# Altium PCB Copy of corePCB3.PcbDoc (part 3 of 3)
Units mil, origin at the board's own origin, x right, y up, seen from the top; angles counter-clockwise.
Board outline 6000 x 4000 mil, 6 copper layers (Top Layer, Layer 3, Layer 1, Layer 2, Layer 4, Bottom Layer), stack 32.111 mil thick; 90 components, 166 nets, 637 pads, 472 vias.
Unrouted connection lines stored in the file: 122.
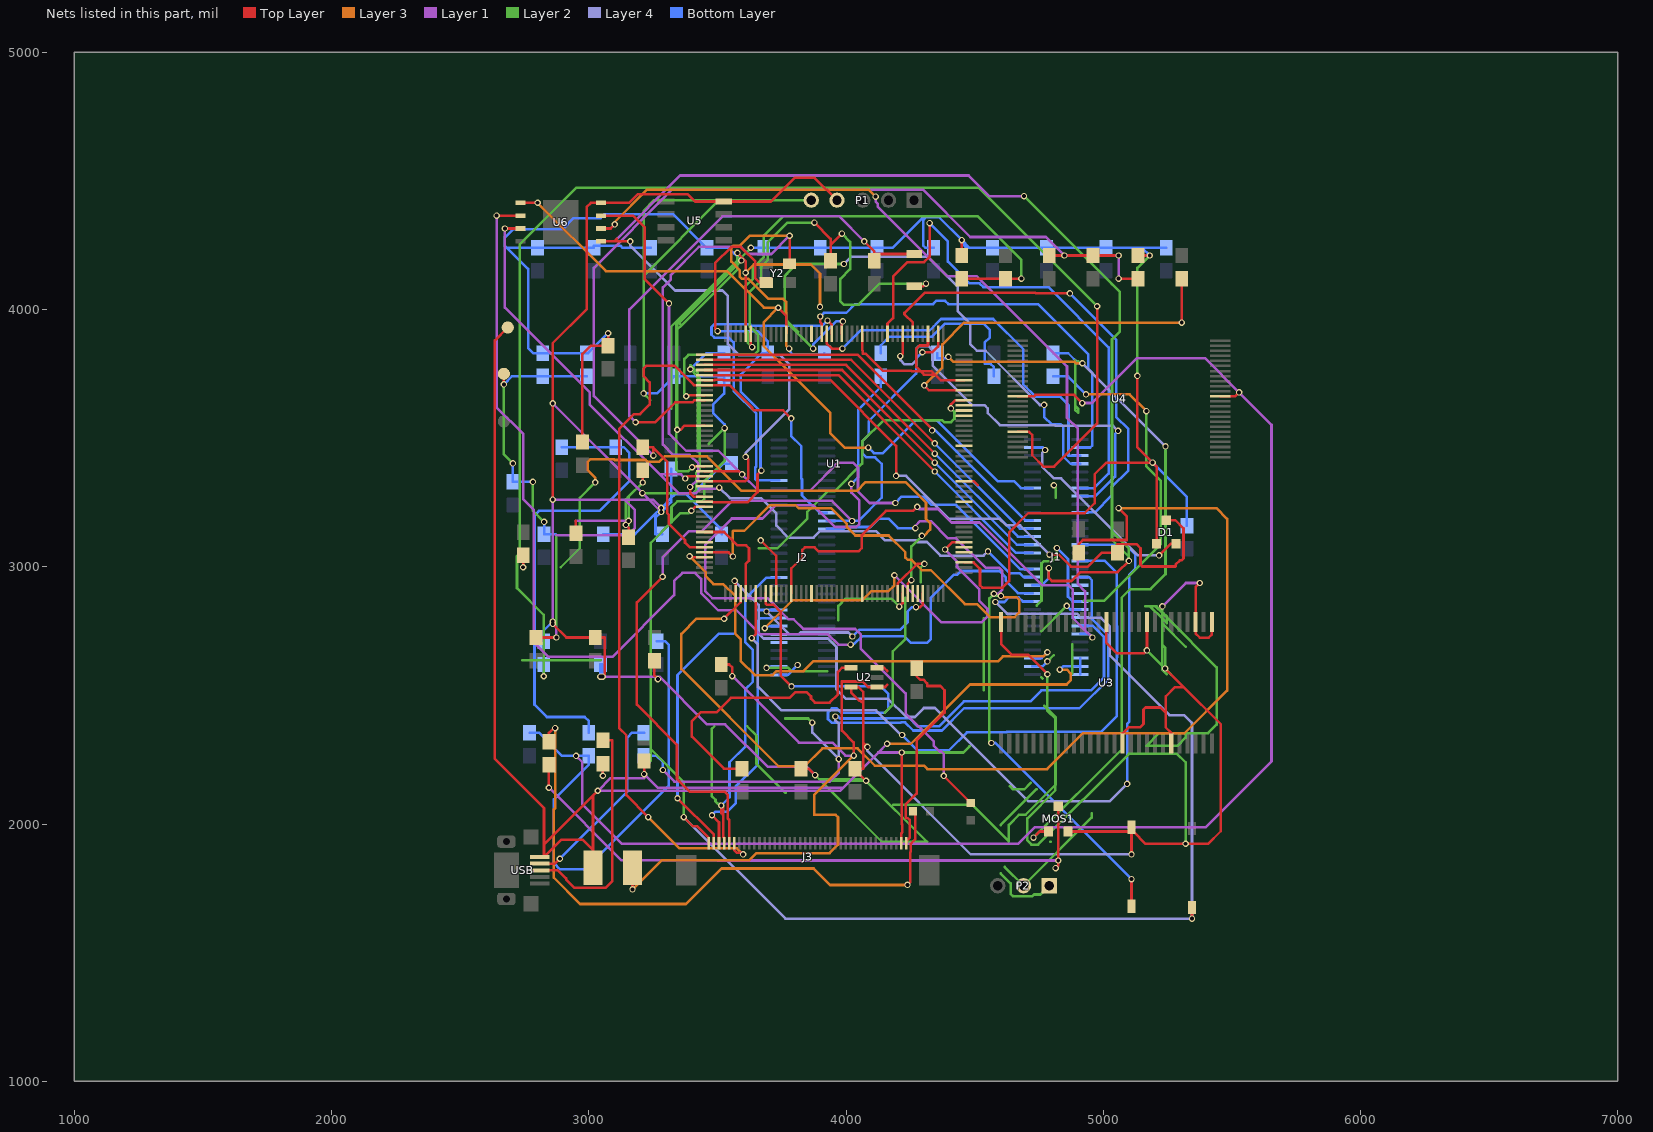
[diagram p7: the nets of this part, all layers, seen from the top]

## Via types
v1: diameter 25, hole 15, Top Layer to Bottom Layer, 472 vias

## Nets (pads, with @x,y where several pads share a name; then routed paths per layer and width w, separated by ;. In a path a pad name is that pad's centre, name@x,y a point inside that pad or via, vN(x,y) a via of type N, cw(c..) or ccw(c..) an arc to the next point about the centre after c; other vN are vias at no path point) (continued)
NetC1_1: C1.1 D1.3 U1.6 | length 2574.1
  Top Layer w10: U1.6@3450,3725.59 3488.98,3725.59 3490.14,3726.75 3520.98,3726.75 3522.14,3725.59 3939.68,3725.59 4195,3470.27 v1(4195,3353) ; v1(4791,3047.5) 4827,3047.5 4874,3000.5 4940.5,3000.5 4995,3055 C1.1@5055.06,3055 5055.06,3088 5129,3088 5145,3072 5145,3008 5152,3001 5280,3001 5281.42,3002.42 5281.42,3008 5298,3024.59 5303.59,3024.59 5312,3033 5312,3149.26 5280,3181.26 D1.3@5245,3181.26
  Layer 4 w10: v1(4195,3353) 4233.46,3353 4400,3186.46 4597.54,3186.46 4622.67,3161.33 4677.17,3161.33 v1(4791,3047.5)
NetC2_2: C2.2 C4.2 R2.1 U1.38 | length 655
  Top Layer w10: C2.2@2950.06,3130 2950.06,3177.94 ; v1(3144.25,3162.5) 3155.06,3151.68 C4.2@3155.06,3115 ; v1(3210,3327.55) R2.1@3210,3375
  Layer 1 w10: 2950.06,3177.94 2950.63,3178.5 v1(3155.06,3178.5)
  Layer 2 w10: v1(3144.25,3162.5) 3144.25,3261.79 3155.06,3272.61 ; v1@3155.06,3162.5 v1(3155.06,3178.5) 3155.06,3272.61 ; v1(3210,3327.55) 3155.06,3272.61
NetC3_1: C3.1 U1.81 | length 2359.9
  Top Layer w10: v1(2745,2998.06) 2745.06,2998.13 C3.1@2745.06,3045 ; U1.81@4239.98,2896.24 4239.98,2933.98 v1(4254,2948)
  Layer 2 w10: 2891.06,2998.06 2965,3072 2965,3268 v1(3025,3328) ; v1(4254,2948) 4254,3079 v1(4295,3120)
  Layer 3 w10: v1(3025,3328) 3025,3346.5 2995.5,3376 2995.5,3408 3005.28,3417.78 3098.65,3417.78 3101.43,3415 3220.93,3415 3227.43,3408.5 3274.43,3408.5 3295.43,3429.5 3460.02,3429.5 3594.52,3295 4042,3295 4076,3329 4231.19,3329 4311,3249.19 4311,3186.5 4327,3170.5 4327,3144 4303,3120 v1(4295,3120)
NetC5_1: C5.1 U1.125 | length 1488
  Top Layer w10: v1(4304,3705) 4322.78,3686.22 U1.125@4459.09,3686.22 ; v1(5305.06,3949.06) C5.1@5305.06,4120
  Layer 3 w10: v1(4304,3705) 4374.5,3775.5 4374.5,3864.26 4459.31,3949.06 v1(5305.06,3949.06)
NetC8_2: C8.2 U1.9 Y1.1 | length 2148.9
  Top Layer w10: v1(3379,3663) 3382.54,3666.54 U1.9@3450,3666.54 ; v1(3877.13,4338) 3940.06,4275.06 3940.06,4251.45 ; C8.2@3940.06,4190 3940.06,4251.45 ; v1(3983.81,4295.19) 3940.06,4251.45 ; Y1.1@4265,4090 4300,4090 v1(4311,4101)
  Layer 2 w10: v1(3379,3663) 3371.5,3670.5 3371.5,3808 3387.5,3824 3643,3824 3659,3840 3659,3900.93 3625.93,3934 3625.93,4070 3671,4115.07 3671,4168 3696.5,4193.5 3696.5,4262 3772.5,4338 v1(3877.13,4338) ; v1(3983.81,4295.19) 4016,4263 4016,4157 3978.26,4119.26 3978.26,4032 3991.03,4019.23 4049,4019.23 4130.77,4101 v1(4311,4101)
NetC9_2: C9.2 U1.10 Y1.2 | length 2100.3
  Top Layer w10: v1(3182,3562) 3259,3562 3336.22,3639.22 3402.5,3639.22 3410.13,3646.85 U1.10@3450,3646.85 ; v1(4071,4265) 4110.06,4225.94 C9.2@4110.06,4215.98 ; C9.2@4110.06,4190 C9.2@4110.06,4215.98 ; Y1.2@4265,4215.98 C9.2@4110.06,4215.98
  Layer 1 w10: v1(3182,3562) 3158,3586 3158,4000 3520,4362 3974,4362 v1(4071,4265)
NetC10_2: C10.2 U1.30 Y2.1 | length 1706
  Top Layer w10: U1.30@3450,3253.15 3479,3253.15 3482.15,3250 3482.65,3250.5 3616.5,3250.5 3656,3290 3656,3359 v1(3671,3374) ; v1(3501,3916) 3491.5,3925.5 3491.5,4180.36 3554.56,4243.42 3590.58,4243.42 3648,4186 3648,4121 3664,4105 Y2.1@3690,4105
  Bottom Layer w10: v1(3501,3916) 3656.61,3916 3696.07,3876.55 C10.2@3696.07,3830.59 3674,3830.59 3591,3747.59 3591,3680 3667.5,3603.5 3667.5,3386.5 3671,3383 v1(3671,3374)
NetC11_2: C11.2 U1.29 Y2.3 | length 2626.5
  Top Layer w10: v1(3394,3310) 3394,3286.83 3408,3272.83 U1.29@3450,3272.83 ; Y2.3@3780.55,4177.83 3780.55,4286.55 v1(3781,4287)
  Layer 1 w10: v1(3394,3310) 3426,3342 3426,3401 3392,3435 3328,3435 3288,3475 3288,4086 3319,4117 3319,4135 3428,4244 3592,4244 3620,4216 3710,4216 v1(3781,4287)
  Layer 3 w10: v1(3779,3848) 3767.54,3859.46 3767.54,4029.46 3755.5,4041.5 3698.5,4041.5 3620.5,4119.5 3595,4119.5 3586.5,4128 3586.5,4153.5 3554,4186 3554,4240 3562.68,4248.68 3588.68,4248.68 3627,4287 v1(3781,4287)
  Bottom Layer w10: v1(3779,3848) 3779,3840 3795,3824 3916.07,3824 C11.2@3916.07,3830.59
NetC28_2: C28.2 J3.1 | length 840.1
  Top Layer w10: J3.1@4234.65,1925 4234.65,1934 4248,1947.35 4248,2015 4240,2023 4233,2023 4233,2077 4274.69,2118.69 4274.69,2324.29 4383,2432.59 4383,2520 4366.5,2536.5 4315.72,2536.5 4315.72,2546.28 4301,2561 4288,2561 4275,2574 C28.2@4275,2605
NetC29_2: C29.2 F1.2 U2.1 U2.3 | length 2676.4
  Top Layer w10: v1(3170,1746) F1.2@3170,1830 ; C29.2@3515,2620 3546,2620 3558,2608 v1(3558,2575) ; v1(4030,2266) 4030,2317 3984,2363 3984,2554 4065,2554 4086.4,2532.6 U2.1@4120,2532.6 4152,2532.6 4161,2541.6 ; U2.3@4120,2607.4 4147.97,2607.4 4161,2594.37
  Layer 1 w10: v1(3558,2575) 3817,2316 3948,2316 3998,2266 v1(4030,2266)
  Layer 3 w10: v1(3170,1746) 3282.5,1858.5 3623.5,1858.5 3652,1887 3936,1887 3969,1920 3969,2026.5 3960,2035.5 3876.37,2035.5 3876,2035.87 3876,2112 v1(4030,2266)
NetC30_2: C30.2 U2.4 | length 1101.3
  Top Layer w10: C30.2@3595.06,2215 3525.84,2215 3401,2339.84 3401,2400 3435,2434 3496,2434 3552.5,2490.5 3780.5,2490.5 3803,2513 3847,2513 3864,2496 3864,2487 3879,2472 3936,2472 3968,2504 3968,2591.4 3984,2607.4 U2.4@4020,2607.4
NetC35_2: C35.2 C36.2 R16.1 U4.12 U4.37 | length 7575.3
  Top Layer w10: U4.12@4667.6,3662.48 4730.5,3662.48 4736.52,3668.5 4886.33,3668.5 v1(4918.33,3636.5) ; U4.37@5455,3662.48 5512.48,3662.48 v1(5528,3678)
  Layer 1 w10: v1(2951,2265) 2974,2242 2974,2078 3129.11,1922.89 4668.89,1922.89 4733,1987 5398,1987 5654,2243 5654,3552 v1(5528,3678) 5395,3811 5131.36,3811 4956.86,3636.5 v1(4918.33,3636.5)
  Bottom Layer w10: C36.2@2770.06,2355 2806,2355 2896,2265 v1(2951,2265) R16.1@3000.06,2265 3000.06,2232.06 2864,2096 2864,1848 2888,1824 2986.23,1824 3311.5,2149.27 3311.5,2696 3297.5,2710 C35.2@3265.06,2710
NetDS0_1: DS0.1 R10.2 | length 2460.7
  Top Layer w10: R10.2@2845,2320 2845,2354 2864,2373 v1(2869,2373) ; v1(4239,1763) 4249,1773 4249,1890 4251,1892 4251,1923 4270,1942 4270,2050 DS0.1@4260,2050
  Layer 3 w10: v1(2869,2373) 2869,2062 2864,2057 2864,1791 2966,1689 3378,1689 3516,1827 3874,1827 3938,1763 v1(4239,1763)
NetMOS1_1: MOS1.1 R13.2 R14.2 | length 3456.9
  Top Layer w10: v1(4729,1947) 4752.79,1970.79 MOS1.1@4787.6,1970.79
  Layer 2 w10: v1(4729,1947) 5072,2290 5072,2880 5105,2913 5184,2913 5242,2971 v1(5242,3468) ; 4891,3803 4891,3610 4903,3598 4903,3614.17 4891.5,3625.67 4891.5,3786.5 4903,3798
  Layer 3 w10: v1(4398,3816) 4417.43,3796.57 4888.32,3796.57 4893.89,3791 v1(4919,3791)
  Layer 4 w10: v1(4919,3791) v1(5242,3468)
  Bottom Layer w10: R14.2@4355.06,3830 4355.06,3810 4399,3810 4399,3816 v1(4398,3816) ; R13.2@4805.06,3830 4864,3830 4903,3791 v1(4919,3791)
NetPWR_1: PWR.1 R15.1 | length 3026.5
  Top Layer w10: v1(4380,2186.93) PWR.1@4485,2081.93
  Layer 1 w10: v1(4021,3322) 4021,3288 4052,3257 4052,3166.96 4039.54,3154.5 3956.5,3154.5 3871.5,3239.5 3727.5,3239.5 3675.5,3187.5 3556,3187.5 3452.5,3084 3452.5,2905.5 3480,2878 3694,2878 3776,2796 3796,2796 3834,2758 4036,2758 4058,2736 4058,2681 4231.5,2507.5 4231.5,2430.24 4341.23,2320.51 4341.23,2304 4363.49,2281.74 4370.26,2281.74 4380,2272 v1(4380,2186.93)
  Bottom Layer w10: v1(4021,3322) 4047,3348 4047,3610 4135.06,3698.06 R15.1@4135.06,3740
NetR1_1: R1.1 U1.48 | length 4388.8
  Top Layer w10: v1(3526.37,2798) 3590.37,2862 U1.48@3590.37,2896.24 ; R1.1@4905.06,3055 4905.06,3088 4921.06,3104 5091.06,3104 5091.06,3196.94 v1(5060,3228)
  Layer 3 w10: v1(3526.37,2798) 3418.49,2798 3360,2739.51 3360,2602 3737.5,2224.5 3838.5,2224.5 3908,2294 4044.78,2294 4111.78,2227 4303,2227 4316.5,2213.5 4781.5,2213.5 4920,2352 5315,2352 5482,2519 5482,3186 5440,3228 v1(5060,3228)
NetR4_1: R4.1 R5.1 U1.171 | length 1934.1
  Top Layer w10: U1.171@3629.74,3905.33 3629.74,3862 3635,3856.74 v1(3635,3854) ; R5.1@4450.06,4120 R4.1@4620.06,4120 v1(4682,4120)
  Layer 2 w10: v1(3635,3854) 3617.5,3871.5 3617.5,3913.93 3609.93,3921.5 3609.93,4091.45 3637.98,4119.5 3637.98,4161.98 3680.5,4204.5 3680.5,4287.33 3756.17,4363 4511,4363 4682,4192 v1(4682,4120)
NetR11_2: R11.2 USB.3 | length 907.6
  Top Layer w10: USB.3@2809,1820 2880,1820 2912,1788 2912,1784 2944,1752 3065,1752 3092,1779 3092,2325 R11.2@3055.06,2325
NetR12_2: R12.2 USB.2 | length 740
  Top Layer w10: USB.2@2809,1845.59 2868.59,1845.59 v1(2888,1865)
  Bottom Layer w10: v1(2888,1865) 3150,2127 3150,2337 3168,2355 R12.2@3215,2355
NetR18_1: R18.1 U4.19 | length 5540
  Top Layer w10: U4.19@4667.6,3524.68 4712,3524.68 4724,3512.68 4724,3433.5 4768,3389.5 4808.5,3389.5 4976,3557 v1(4976,4013)
  Layer 2 w10: 2742,2637 2825,2637 ; v1(2825,2574.47) 2825,2637 ; 3047,2637 2825,2637 ; v1(4976,4013) 4515,4474 2952,4474 2732,4254 2732,3052 2721,3041 2721,2917 2825,2813 2825,2637
  Bottom Layer w10: v1(2825,2574.47) 2825.06,2574.54 R18.1@2825.06,2620
NRF_CE: J2.25 U1.155 | length 1317.7
  Top Layer w10: v1(3928,3957) 3944.7,3940.3 U1.155@3944.7,3905.33
  Bottom Layer w10: J2.25@3740,3335.94 3651.12,3335.94 3647.5,3339.57 3647.5,3386.5 3651.5,3390.5 3651.5,3595.5 3563,3684 3563,3872 3544,3891 3488,3891 3477,3902 3477,3932 3488,3943 3625.93,3943 3631.43,3937.5 3908.5,3937.5 v1(3928,3957)
NRF_CS: J1.34 U1.153 | length 2317.2
  Top Layer w10: U1.153@3984.07,3905.33 3984.07,3950.07 v1(3988,3954)
  Layer 2 w10: 3771,3956 3814,3913 ; v1(3872,3848) 3767.54,3952.46 3767.54,3984.45 3762,3989.99 3762,4131 3771,4140 3808,4177 v1(3992,4177)
  Layer 4 w10: v1(3992,4177) 4020,4205 4318,4205 4435,4088 4435,3993 4483.5,3944.5 4483.5,3864.89 4508.63,3839.75 4543.25,3839.75 4754,3629 v1(4770,3629)
  Bottom Layer w10: v1(3872,3848) 3872,3864 3962,3954 v1(3988,3954) ; v1(4770,3629) 4770,3583 4800,3553 4835.59,3553 4844.5,3544.09 4844.5,3429.5 4873.49,3400.51 J1.34@4910,3400.51
PA0: J2.42 U1.40 WKUP.1 | length 4136.7
  Top Layer w10: U1.40@3450,3056.3 3544,3056.3 v1(3560.3,3040) ; WKUP.1@5110,1680 v1(5110,1786)
  Layer 1 w10: v1(4270,3150.5) 4270,3159.5 4288,3177.5 4329.57,3177.5 4396.49,3110.58 4428.47,3110.58 4543.51,2995.54 4596.01,2995.54 4608,2983.54 4608,2912 4591,2895 v1(4575,2895)
  Layer 2 w10: v1(4565,2315) 4557.5,2322.5 4557.5,2876 ; v1(4575,2895) 4557.5,2877.5 4557.5,2876 ; v1(4602,2886.5) 4568,2886.5 4557.5,2876
  Layer 3 w10: v1(3560.3,3040) 3560.3,3138.8 3561.5,3140 3604.84,3140 3704.34,3239.5 3803.79,3239.5 3815.5,3227.79 3941.44,3227.79 4003.71,3165.52 4003.71,3154.5 4036.69,3121.52 4165.76,3121.52 4230.8,3056.48 4230.8,3035.7 4240,3026.5 4255,3026.5 4294.54,2986.96 4329.43,2986.96 4461.9,2854.5 4509.98,2854.5 4560,2804.48 4656,2804.48 4673,2821.48 4673,2872.5 4664,2881.5 4607,2881.5 v1(4602,2886.5)
  Bottom Layer w10: J2.42@3925.04,3146.97 3990.47,3146.97 3998,3154.5 4095.02,3154.5 4128,3187.48 4164.95,3187.48 4201.92,3150.5 v1(4270,3150.5) ; v1(4565,2315) 4581,2315 v1(5110,1786)
PA1: J1.3 U1.41 | length 1891.3
  Top Layer w10: v1(3392,3041) 3396.39,3036.61 U1.41@3450,3036.61
  Layer 3 w10: v1(3392,3041) 3455.04,2977.96 3455.04,2962.42 3484.84,2932.62 3522.66,2932.62 3569.53,2885.75 3569.53,2739.1 3590.08,2718.55 3590.08,2633.97 3645.56,2578.5 3714.5,2578.5 3730.5,2594.5 3835.5,2594.5 3874.5,2633.5 4592,2633.5 4610,2651.5 4767,2651.5 v1(4783,2667.5)
  Bottom Layer w10: J1.3@4724.96,2644.61 4760.11,2644.61 v1(4783,2667.5)
PA3: J1.44 U1.47 | length 3285.1
  Top Layer w10: v1(3567,2945) 3570.69,2941.31 U1.47@3570.69,2896.24
  Layer 4 w10: v1(3567,2945) 3660,2852 3660,2741 3680,2721 3930,2721 3963,2688 3963,2523.5 4000,2486.5 4164,2486.5 4234.5,2416 4268,2416 4303,2451 4346,2451 4709,2088 5025,2088 v1(5093,2156)
  Bottom Layer w10: J1.44@4910,3085.55 5088,3085.55 5124,3049.55 5124,2992 5101,2969 5101,2397 5093,2389 v1(5093,2156)
PA5: J1.46 U1.51 | length 2651
  Top Layer w10: v1(3633.43,2722.57) 3649.43,2738.57 U1.51@3649.43,2896.24
  Layer 4 w10: v1(3633.43,2722.57) 3657.5,2698.5 3657.5,2534.13 3749.63,2442 4117.5,2442 4213.5,2346 v1(4218,2346)
  Bottom Layer w10: v1(4218,2346) 4277.5,2286.5 4399.5,2286.5 4469.5,2356.5 4623.13,2356.5 4624.63,2358 4991.5,2358 5051.97,2418.47 5051.97,2647.29 5053.47,2648.79 5053.47,2767.97 5051.97,2769.47 5051.97,2977.03 5006.44,3022.56 J1.46@4910,3022.56
PA7: J1.48 U1.53 | length 2799.5
  Top Layer w10: U1.53@3688.8,2896.24 3688.8,2856 3692.44,2852.36 3717.67,2852.36 3746,2824.04 3746,2577 v1(3788,2535)
  Bottom Layer w10: v1(3788,2535) 4136,2535 4165,2506 4165,2448 4149.25,2432.25 3981.75,2432.25 3964.5,2449.5 3945.5,2449.5 3930,2434 3930,2408 3944,2394 4212.86,2394 4213.98,2395.12 4229.88,2395.12 4261.5,2363.5 4372.5,2363.5 4459,2450 4907.41,2450 5019.97,2562.56 5019.97,2733.25 4956,2797.22 4956,2947.57 4944,2959.57 J1.48@4910,2959.57
PA9: J1.51 P2.1 U1.120 | length 1116.9
  Layer 2 w10: 4601,1808 4640,1769 4640,1728.47 4649,1719.47 4724.47,1719.47 4731,1726 4756,1726 P2.1@4790,1760 ; 4601,1995.37 4741,2135.37 ; 4741,2849 4760,2868 4760,3013 4768,3021 4801,3021 4820,3040 v1(4820,3073) ; 4879,2584 4879,2699
  Bottom Layer w10: v1(4820,3073) 4863,3030 4863,2884 4881.92,2865.08 J1.51@4910,2865.08
PA10: J1.52 P2.2 U1.121 | length 699.1
  Layer 2 w10: 4617,1833 P2.2@4690,1760 4955,2025 4955,2041 ; 4759,2570.5 4764,2565.5 ; 4759,2749 v1(4858,2848)
  Bottom Layer w10: v1(4858,2848) 4872.42,2833.58 J1.52@4910,2833.58
PA11: J1.53 R11.1 U1.122 | length 47.5
  Top Layer w10: v1(3055.06,2187.5) R11.1@3055.06,2235
PA12: J1.54 R12.1 U1.123 | length 3917.2
  Top Layer w10: v1(4408,3615.8) 4408,3630.85 4424,3646.85 U1.123@4459.09,3646.85
  Layer 1 w10: v1(3288,2210) 3333,2165 3936,2165 3972,2201 v1(3972,2252)
  Layer 2 w10: 3661.11,3072 3733.47,3072 3849.5,3188.03 3849.5,3213.88 3928.68,3293.06 3954.53,3293.06 4063,3401.53 4063,3487 4145.5,3569.5 4374.5,3569.5 4381.6,3562.4 4408.13,3562.4 4421.73,3576 4421.73,3602.06 v1(4408,3615.8) ; 3764.07,2410 3853,2410 v1(3869,2394)
  Layer 4 w10: v1(3869,2394) 3869,2355 v1(3972,2252) 3972,2389 3959,2402 v1(3959,2418)
  Bottom Layer w10: R12.1@3215,2265 3264,2265 3288,2241 v1(3288,2210) ; v1(3959,2418) 3969.5,2418 3977.5,2410 4159.28,2410 4160.4,2411.12 4245.88,2411.12 4277.5,2379.5 4361.78,2379.5 4458.78,2476.5 4716.5,2476.5 4759.4,2519.4 4952.87,2519.4 5002.94,2569.47 5002.94,2727.65 4960,2770.59 J1.54@4910,2770.59
PB2: J1.55 U1.58 U6.6 | length 4992.5
  Top Layer w10: U6.6@3047.99,4315 3085,4315 v1(3101,4331) ; U1.58@3787.22,2896.24 3787.22,2993.78 3829.88,3036.44 3829.88,3065.38 3840,3075.5 3877.5,3075.5 3893.07,3059.93 4048.43,3059.93 4060.5,3072 4060.5,3121.99 4155.51,3217 4261,3217 v1(4277,3233)
  Layer 1 w10: v1(4115,4439) 4115,4420 4123,4412 4123,4400 4394,4129 4509,4129 4859,3779 4859,3579 4901,3537 4901,2933 4930,2904 4930,2753 ; v1(4277,3233) 4285.5,3224.5 4358.5,3224.5 4411,3172 4519,3172 4762.25,2928.75 4864.79,2928.75 4881.54,2912 4881.54,2801.46 4930,2753 ; v1(4958,2725) 4930,2753
  Layer 3 w10: v1(3101,4331) 3101,4340 3227,4466 4088,4466 v1(4115,4439)
  Bottom Layer w10: J1.55@4910,2739.09 4943.91,2739.09 v1(4958,2725)
PB6: J1.24 U1.164 U6.1 | length 2884.4
  Top Layer w10: U6.1@2735,4415 v1(2800.91,4415) ; v1(3736.54,4007) 3767.54,3976 U1.164@3767.54,3905.33
  Layer 3 w10: v1(2800.91,4415) 3066.35,4149.55 3538,4149.55 3680.55,4007 v1(3736.54,4007) 3680,3950.46 3680,3858 3938.5,3599.5 3938.5,3519.5 3994.5,3463.5 v1(4086.5,3463.5)
  Bottom Layer w10: v1(4086.5,3463.5) 4108.5,3441.5 4143.5,3441.5 4272,3570 4352.7,3570 4589.7,3333 4653.02,3333 4680,3306.02 J1.24@4724.96,3306.02
PB10: J2.2 U1.79 | length 1024.7
  Top Layer w10: U1.79@4200.61,2896.24 4200.61,2934.61 4277,3011 v1(4305,3011)
  Layer 2 w10: v1(3691,2607) 3776,2607 3788.5,2594.5 3926.48,2594.5 ; 4150,2432 4182,2464 4182,2671.5 4230.5,2720 4230.5,2879.5 ; 4290.2,2939.2 4290.2,2996.2 v1(4305,3011)
  Bottom Layer w10: v1(3691,2607) 3695.54,2611.54 J2.2@3740,2611.54
PB11: J2.1 U1.80 | length 461.8
  Top Layer w10: v1(4207,2845) 4220.3,2858.3 U1.80@4220.3,2896.24
  Layer 2 w10: 3970.03,2792.03 3970.03,2848 3998.01,2875.98 4176.02,2875.98 v1(4207,2845)
  Bottom Layer w10: J2.1@3740,2580.04 3774.04,2580.04 v1(3812,2618)
PB13: J2.5 U1.93
PB14: J2.6 U1.94
PB15: J2.7 U1.95 | length 1532.3
  Top Layer w10: v1(4385,3067) 4413.67,3095.67 U1.95@4459.09,3095.67
  Layer 1 w10: v1(4188,2967) 4370,2785 4528,2785 4550,2807 4550,2836.37 4518.69,2867.68 4518.69,2912 4431.61,2999.08 4431.61,3020.39 v1(4385,3067)
  Layer 3 w10: v1(3684,2761) 3793,2870 4064,2870 4098,2904 4164,2904 4188,2928 v1(4188,2967)
  Bottom Layer w10: v1(3684,2761) 3692.02,2769.02 J2.7@3740,2769.02
PC4: J1.49 U1.54
PC5: J1.50 U1.55 | length 230.9
  Top Layer w10: v1(3668.55,3102.44) 3728.17,3042.82 U1.55@3728.17,2896.24
PC10: J1.40 U1.139 | length 1827.9
  Top Layer w10: U1.139@4259.67,3905.33 4259.67,3948.83 4227.5,3981 4227.5,3986.72 4306.28,4065.5 4735.56,4065.5 4738.06,4063 v1(4870.13,4063)
  Bottom Layer w10: v1(4870.13,4063) 5050.5,3882.63 5050.5,3582.5 5097.5,3535.5 5097.5,3373.92 5032.79,3309.21 5032.79,3276.98 4967.35,3211.54 J1.40@4910,3211.54
PC12: J1.38 U1.141 | length 1546.3
  Top Layer w10: v1(4211,3819) 4220.3,3828.3 U1.141@4220.3,3905.33
  Layer 4 w10: v1(4211,3819) 4211,3803 4227,3787 4256,3787 4273.5,3804.5 4273.5,3848 4283,3857.5 4320,3857.5 4336.5,3841 4336.5,3781.98 4491.14,3627.34 4539.66,3627.34 4551,3616 4551,3597.32 4597.82,3550.5 4812,3550.5 4814.5,3548 5038,3548 v1(5058,3528)
  Bottom Layer w10: J1.38@4910,3274.53 4969.74,3274.53 5046,3350.79 5046,3516 v1(5058,3528)
PD2: J1.37 U1.144 | length 2104.1
  Top Layer w10: U1.144@4161.24,3905.33 4161.24,3945.06 4183.37,3967.19 4183.37,4128.37 4239,4184 4304,4184 4325,4205 v1(4325,4336)
  Bottom Layer w10: v1(4325,4336) 4396,4265 4396,4186 4480,4102 4519,4102 4534,4087 4787,4087 5021.25,3852.75 5021.25,3362.59 4964.69,3306.02 J1.37@4910,3306.02
PE2: J1.20 U1.1 | length 1543.8
  Top Layer w10: U1.1@3450,3824.02 4045.98,3824.02 v1@4335,3535
  Bottom Layer w10: v1(4335,3530) 4337.44,3530 4342.44,3535 4697.4,3180.04 J1.20@4724.96,3180.04
PE3: J1.19 U1.2 | length 1546.6
  Top Layer w10: U1.2@3450,3804.33 4020.42,3804.33 v1(4344.95,3479.8)
  Bottom Layer w10: v1(4344.95,3479.8) 4676.21,3148.54 J1.19@4724.96,3148.54
PE4: J1.18 U1.3 | length 1551.7
  Top Layer w10: U1.3@3450,3784.65 4000.73,3784.65 4167.88,3617.5 4167.88,3617.12 v1(4345,3440)
  Bottom Layer w10: v1(4345,3440) 4667.95,3117.05 J1.18@4724.96,3117.05
PE5: J1.17 U1.4 | length 1556.4
  Top Layer w10: U1.4@3450,3764.96 3985.04,3764.96 v1(4345,3405)
  Bottom Layer w10: v1(4345,3405) 4664.45,3085.55 J1.17@4724.96,3085.55
PE6: J1.16 U1.5 | length 1561.3
  Top Layer w10: U1.5@3450,3745.28 3970,3745.28 v1(4345,3370.28)
  Bottom Layer w10: v1(4345,3370.28) 4661.22,3054.06 J1.16@4724.96,3054.06
PF6: J1.14 U1.24 U6.7 | length 2976.1
  Top Layer w10: U6.7@3047.99,4365 3172,4365 3217,4320 3217,4119 v1(3312,4024) ; U1.24@3450,3371.26 3583.74,3371.26 v1(3596,3359)
  Layer 1 w10: v1(3312,4024) 3312,3517.43 3378.41,3451.02 3503.98,3451.02 v1(3596,3359) 3659.5,3295.5 3860.29,3295.5 3969.29,3404.5 4027.5,3404.5 4046.61,3385.39 4046.61,3293.39 4092,3248 v1(4192,3248)
  Bottom Layer w10: v1(4192,3248) 4216.5,3272.5 4300.5,3272.5 4332.5,3240.5 4427.87,3240.5 4677.31,2991.06 J1.14@4724.96,2991.06
PF7: J1.13 U1.25 U6.3 | length 3145.1
  Top Layer w10: v1(2674,4315) U6.3@2735,4315 ; v1(3375,3343) 3383.58,3351.58 U1.25@3450,3351.58
  Layer 1 w10: v1(2674,4315) 2674,4008 3003.5,3678.5 3003.5,3631.53 3276.03,3359 ; v1(3375,3343) 3359,3359 3276.03,3359 ; v1(3507,3308) 3501.5,3302.5 3433.5,3302.5 3417.5,3286.5 3348.53,3286.5 3276.03,3359
  Layer 4 w10: v1(3507,3308) 3548.5,3266.5 3669.5,3266.5 3728.98,3207.02 3728.98,3159.52 3775,3113.5 3874.25,3113.5 3899.25,3138.5 4116.5,3138.5 4152,3103 4271,3103 4277.72,3096.28 4314,3096.28 4366.97,3043.31 4535.31,3043.31 v1(4552,3060)
  Bottom Layer w10: v1(4552,3060) 4637.5,2974.5 4676,2974.5 4690.93,2959.57 J1.13@4724.96,2959.57
PF8: J1.12 U1.26 U6.5 | length 5713
  Top Layer w10: U6.5@3047.99,4265 3099,4265 ; 3109,4275 3099,4265 ; v1(3161,4265) 3099,4265 ; U1.26@3450,3331.89 3608,3331.89 3620,3343.89 3620,3417 v1(3610,3427) ; v1(4788.5,2995) 4788.5,2956.25 4800,2944.75 4876.75,2944.75 4911,2979 5056,2979 v1(5100,3023)
  Layer 1 w10: 3109,4275 3355,4521 4476.63,4521 4556.63,4441 v1(4692,4441)
  Layer 2 w10: v1(4692,4441) 4982,4151 5034,4099 5065,4068 5065,3915 5034,3884 5034,3137 ; v1(5100,3023) 5100,3039 ; 5034,3137 5034,3105 5100,3039 ; 5034,3137 5100,3071 5100,3039
  Layer 4 w10: v1(3161,4265) 3161,4249 3336,4074 3520,4074 3541,4053 3541,3866 3584,3823 3744,3823 3780,3787 3780,3613 3610,3443 v1(3610,3427)
  Bottom Layer w10: J1.12@4724.96,2928.07 4760.07,2928.07 4788.5,2956.5 v1(4788.5,2995)
PF9: J1.11 U1.27 U6.2 | length 4364.5
  Top Layer w10: v1(2642,4365) U6.2@2735,4365
  Layer 1 w10: v1(2642,4365) 2642,3620 2746,3516 2746,3262 2786,3222 2786,2708 2844,2650 3092,2650 3332,2890 3332,2944 3364,2976 3413,2976 3436.5,2952.5 3436.5,2897.5 3503,2831 3573.63,2831 3667.13,2737.5 3930.5,2737.5 3970.5,2697.5 v1(4018,2697.5)
  Bottom Layer w10: v1(4018,2697.5) 4020.58,2700.08 4032,2700.08 4061.42,2729.5 4227.36,2729.5 4252.86,2704 4314,2704 4330,2720 4330,2880 4418.15,2968.15 4431.61,2968.15 4446.96,2983.5 4596.76,2983.5 4620.26,2960 4620.26,2945.74 4668.5,2897.5 4687.57,2897.5 4688.5,2896.57 J1.11@4724.96,2896.57
PG3: J2.13 J3.37 U1.107 | length 2084.5
  Top Layer w10: J3.37@3525.98,1925 3525.98,1946 3523,1948.98 3523,2033.83 ; U1.107@4459.09,3331.89 4497.11,3331.89 4512,3317 ; 3523,2033.83 3523,2064 v1(3515,2072) 3515,2041.83 3523,2033.83
  Layer 2 w10: 3488,2380 3478,2370 3478,2109 3492.73,2094.27 3492.73,2088 3501.23,2079.5 3507.5,2079.5 v1(3515,2072) ; 3616,2380 3652,2344 3652,2234 3765,2121 ; 4637,2147 4649,2135 4693,2135 4718,2160 ; v1(4808,3317) 4816,3309 4816,3268
  Bottom Layer w10: v1(3515,2072) 3547,2104 3547,2240 3609,2302 3609,2524 3638,2553 3638,2677 3609,2706 3609,2876 3690.99,2957.99 J2.13@3740,2957.99
PG13: J1.33 U1.156 | length 1493.9
  Top Layer w10: U1.156@3925.02,3905.33 3925.02,3867.98 3945,3848 v1(3986,3848)
  Bottom Layer w10: v1(3986,3848) 4057,3919 4325.57,3919 4369.68,3963.1 4571.9,3963.1 4689,3846 4689,3709 4736,3662 4832,3662 4865,3629 4865,3432.01 J1.33@4910,3432.01
PG14: J1.32 U1.157 | length 1634.4
  Top Layer w10: v1(3900,3973) 3900,3950 3905.33,3944.67 U1.157@3905.33,3905.33
  Bottom Layer w10: v1(3900,3973) 3914,3987 4001,3987 4035,4021 4338.28,4021 4350.78,4033.5 4385.28,4033.5 4397.78,4021 4746,4021 4942.5,3824.5 4942.5,3769.5 4958,3754 4958,3472 4949.5,3463.5 J1.32@4910,3463.5
PH6: J2.8 J3.38 U1.83 | length 1064.1
  Top Layer w10: v1(3479,2034) 3506.3,2006.7 J3.38@3506.3,1925
  Bottom Layer w10: v1(3479,2034) 3493,2048 3539,2048 3571,2080 3571,2145 3657,2231 3657,2789.51 3668,2800.51 J2.8@3740,2800.51
PH7: J2.9 J3.39 U1.84 | length 1862
  Top Layer w10: v1(3345,2100) 3486.61,1958.39 J3.39@3486.61,1925 ; v1(4272,2843) 4288,2843 4299.04,2854.04 U1.84@4299.04,2896.24
  Layer 4 w10: v1(3691,2826) 3779.5,2737.5 3816,2737.5 3823,2744.5 4009.5,2744.5 v1(4025,2729)
  Bottom Layer w10: v1(3345,2100) 3345,2579 3505,2739 3561,2739 ; 3654.01,2832.01 v1@3697.01,2832.01 ; v1(3691,2826) v1@3697.01,2832.01 ; J2.9@3740,2832.01 v1@3697.01,2832.01 ; v1(4025,2729) 4051,2755 4210,2755 4239,2784 4239,2826 4256,2843 v1(4272,2843)
PI3: J2.41 J3.36 U1.134 | length 3325
  Top Layer w10: v1(3287,2961) 3187,2861 3187,2464 3343,2308 3343,2175 3392,2126 3528,2126 3541,2113 3541,2021 3545.67,2016.33 J3.36@3545.67,1925 ; v1(4297,3834) 4336,3834 4358.09,3856.09 U1.134@4358.09,3905.33
  Layer 1 w10: v1(3287,2961) 3287,3035.37 3390.24,3138.61 3439.61,3138.61 3557,3256 3946,3256 v1(4024,3178)
  Bottom Layer w10: J2.41@3925.04,3178.46 v1@4023.54,3178.46 ; v1(4024,3178) v1@4023.54,3178.46 ; v1(4297,3834) 4272.5,3809.5 4272.5,3750.5 4088.5,3566.5 4088.5,3512.5 4063,3487 4063,3442.5 4080,3425.5 4112.95,3425.5 4139,3399.45 4139,3269 4048.46,3178.46 v1@4023.54,3178.46
PI8: J2.40 J3.35 U1.7 | length 3466.3
  Top Layer w10: v1(3231,2027) 3146,2112 3146,2345 3119,2372 3119,3537 3175,3593 3200,3593 3237,3630 3237,3717 3213,3741 3213,3771 3224,3782 3333,3782 3409.09,3705.91 U1.7@3450,3705.91 3547.09,3705.91 3634.5,3618.5 3634.5,3616 3642.5,3608 3756,3608 v1(3787,3577) ; J3.35@3565.35,1925 3565.35,1899.65 3577,1888 3594,1888 v1(3600,1882)
  Layer 3 w10: v1(3231,2027) 3353,1905 3577,1905 v1(3600,1882)
  Bottom Layer w10: v1(3787,3577) 3787,3508 3826,3469 3826,3343 3829,3340 3829,3277.12 3896.16,3209.96 J2.40@3925.04,3209.96
RESET: C12.1 J1.10 J3.40 P1.5 R6.1 RST.1 U1.31 | length 8909.4
  Top Layer w10: v1(3369,2027) 3405.41,1990.59 3422.39,1990.59 3466.93,1946.05 J3.40@3466.93,1925 ; v1(3399,3218) 3414.46,3233.46 U1.31@3450,3233.46 ; v1(5345,1632) RST.1@5345,1675
  Layer 2 w10: 3239,3648 v1(3213,3674) 3213,4131 ; 3241,2246.93 3241,2292 ; v1(3369,2027) 3369,2164 3241,2292 ; v1(3399,3218) 3388.5,3207.5 3355.5,3207.5 3321.5,3173.5 ; 3466,3477 v1(3528,3539) 3528,3411.9 3449.5,3333.4 3449.5,3264 3440,3254.5 3344,3254.5 3321.5,3232 3321.5,3173.5 ; P1.5@3865,4425 3507,4425 ; 3213,4131 3213,4384 3254,4425 3507,4425 ; 3213,4131 3507,4425 ; 3241,2292 3241,3010 3241,3093 3321.5,3173.5
  Layer 4 w10: v1(3369,2027) 3764,1632 v1(5345,1632) 5345,2393 5314.5,2423.5 5257.5,2423.5 5026,2655 5026,2767 4992,2801 4914.5,2801 4897.5,2818 4626,2818 v1(4581,2863)
  Bottom Layer w10: v1(3213,3674) 3265,3674 C12.1@3331.07,3740.07 ; v1(3528,3539) 3528,3553 3484.5,3596.5 3484.5,3632 3526.07,3673.57 R6.1@3526.07,3740 ; v1(4581,2863) 4616,2863 4634.5,2881.5 4671.5,2881.5 4687.92,2865.08 J1.10@4724.96,2865.08 ; C12.1@3331.07,3740.07 C12.1@3331.07,3740.59 R6.1@3526.07,3740.59 R6.1@3526.07,3740 ; C12.1@3331.07,3740.07 3331.07,3740 R6.1@3526.07,3740
VBAT: D1.2 J1.29 | length 803.9
  Top Layer w10: v1(5217,3044) 5261.74,3088.74 D1.2@5282.4,3088.74
  Layer 4 w10: v1(4774,3454) 4762.74,3442.74 4762.74,3388.76 4807.9,3343.6 4836.4,3343.6 5136,3044 v1(5217,3044)
  Bottom Layer w10: J1.29@4724.96,3463.5 4764.5,3463.5 v1(4774,3454)
VCC: R16.2 R20.2 R21.2 | length 1824.1
  Bottom Layer w10: R21.2@2895.06,3465 R20.2@3105.06,3465 3136,3465 3158,3443 3158,3334 3041.12,3217.12 2806.12,3217.12 2789,3200 2789,2464 2837,2416 2984.06,2416 3000.06,2400 R16.2@3000.06,2355
VCC3.3: 3.3V.1 C31.2 C32.2 C37.2 C38.2 C39.2 C40.2 C41.2 C42.2 C43.2 C44.1 C45.1 MOS1.2 P1.4 R6.2 R8.1 R9.1 R17.1 R18.2 R19.1 U2.5 U3.1 U3.3 U3.9 U3.14 U3.27 U3.43 U3.49 U5.8 U6.8 WKUP.2 | length 21115
  Top Layer w10: v1(2670,3709) 3.3V.1@2670,3750 ; C42.2@2795.06,2725 v1(2874,2725) ; v1(2860,2778) 2913,2725 C43.2@3025.06,2725 3062,2725 3062,2581 v1(3054,2573) ; v1(2860,3261) v1(2860,3635) 2860,3869 2992,4001 2992,4399 3008,4415 U6.8@3047.99,4415 3157,4415 3190,4448 3385,4448 3413,4420 U5.8@3525,4420 3708,4420 3800,4512 3878,4512 P1.4@3965,4425 ; R19.1@3255.06,2635 3255.06,2576.94 v1(3269,2563) ; C31.2@3825.06,2215 3855,2215 v1(3880,2190) ; v1(4078,2168) 4035.06,2210.94 C32.2@4035.06,2215 4067,2215 4067,2316 ; v1(4083,2300) 4067,2316 ; U3.27@4603.07,2785 4603.07,2699.42 4643.99,2658.5 4706.9,2658.5 v1(4783,2582.4) ; MOS1.2@4862.4,1970.79 WKUP.2@5110,1970.79 ; U3.14@5012.52,2785 5012.52,2704.48 5054,2663 5158,2663 v1(5170,2675) U3.9@5170,2785 ; U3.43@5075.51,2312.56 5075.51,2352 5100.01,2376.5 5144,2376.5 5156.5,2389 5156.5,2444.99 5164.51,2453 5222,2453 5243,2432 ; v1(5110,1882) WKUP.2@5110,1970.79 ; WKUP.2@5110,1987.09 WKUP.2@5110,1978 ; v1(5240.5,2604.5) 5312.71,2532.29 ; U3.49@5264.49,2312.56 5264.49,2354.51 5243,2376 5243,2432 ; v1(5374.98,2937) 5358.98,2921 U3.3@5358.98,2785 5358.98,2741.02 5376,2724 5409.97,2724 5421.97,2736 U3.1@5421.97,2785 ; 4067,2316 4067,2468 ; 4067,2468 4067,2513.6 4048,2532.6 U2.5@4020,2532.6 4020,2512 4053,2479 4056,2479 4067,2468 ; WKUP.2@5110,1970.79 WKUP.2@5117.21,1970.79 ; WKUP.2@5110,1970.79 WKUP.2@5110,1978 ; WKUP.2@5110,1978 WKUP.2@5117.21,1970.79 ; WKUP.2@5117.21,1970.79 5165,1923 v1(5320,1923) 5408,1923 5456.84,1971.84 5456.84,2388.16 5312.71,2532.29 ; 5243,2432 5243,2496 5279.29,2532.29 5312.71,2532.29
  Layer 1 w10: v1(2860,3635) v1(3208.5,3286.5) 3234,3261 ; v1(2874,2725) 2874,2764 v1(2860,2778) v1(2860,2787.13) v1(2860,3261) 3138,3261 ; 2874,3123 3152,3123 3179,3150 3179,3220 3138,3261 ; v1(3045.06,2573) v1(3054,2573) 3259,2573 ; v1(3269,2563) 3259,2573 ; v1(3282,3213) 3274,3221 3234,3261 ; v1(3282,3229) 3250,3261 3234,3261 ; v1(3880,2190) 3848,2222 3696,2222 3530.5,2387.5 3460.5,2387.5 3275,2573 3259,2573 ; v1(5230,2846) 5321,2937 v1(5374.98,2937) ; 3138,3261 3234,3261
  Layer 2 w10: v1(2670,3709) 2670,3437 v1(2705,3402) ; v1(2783,3330) 2783,3217.81 v1(2826.38,3174.43) ; 2874,2764 2874,3123 ; v1(3208.5,3286.5) 3408,3286.5 3417.5,3296 3417.5,3363.63 3431,3377.13 3431,3732 3423,3740 ; v1(3395,3768) 3423,3740 ; 3395,3784 3423,3756 3423,3740 ; 3423,3450 3423,3740 ; v1(3880,2190) 3896,2174 ; 4183,2075 4489.29,2075 4633,1931.29 4633,1997 4672,2036 4698,2036 4813.5,2151.5 ; 4771,2459 4783,2447 ; v1(4783,2582.4) 4783,2447 ; 4795,1931 4795.29,1931.29 ; 5163,2846 5182,2846 ; v1(5170,2675) 5230,2615 ; v1(5230,2846) 5230,2823 ; 5247,2582 5243.15,2585.85 5230,2599 5230,2615 ; 5263,2582 v1(5240.5,2604.5) ; v1(5320,1923) 5320,2240 5287,2273 5099.46,2273 4746.46,1920 4721.04,1920 4705.04,1936 4705.04,2021.92 4813.5,2130.38 4813.5,2151.5 ; 5320,2689 5230,2779 ; 3896,2174 3902,2168 ; 3896,2174 4072,2174 v1(4078,2168) ; 3902,2168 4139,1931 4315,1931 v1(4078,2168) ; 3902,2168 v1(4078,2168) ; 4783,2447 4783,2440 4813.5,2409.5 4813.5,2151.5 ; 4783,2447 4816,2414 4816,2154 4813.5,2151.5 ; 5182,2846 5204,2846 ; 5182,2846 5230,2798 ; 5204,2846 5207,2846 5230,2823 ; 5204,2846 5230,2820 ; 5230,2615 v1(5240.5,2604.5) ; 5230,2615 5230,2696 ; 5230,2696 5230,2779 ; 5230,2696 5240.5,2685.5 v1(5240.5,2604.5) ; 5230,2779 5230,2798 ; 5230,2798 5230,2820 ; 5230,2798 5247,2781 5247,2803 ; 5230,2820 5230,2823 ; 5230,2820 5247,2803 ; 5230,2823 5247,2806 ; 5247,2803 5248.5,2804.5 5247,2806 ; 5247,2803 5247,2806 ; 5247,2803 5441,2609 5441,2386 5408,2353 5320,2353 ; 5320,2353 5320,2336 5288,2304 5168,2304 5217,2353 5320,2353
  Layer 4 w10: v1(4083,2300) 4083,2284 4485,1882 v1(5110,1882)
  Bottom Layer w10: v1(2670,3709) 2701.59,3740.59 R9.1@2821.07,3740.59 2821.07,3740 2991.07,3740 R8.1@2991.07,3740.59 ; v1(2705,3402) C37.2@2705,3330 v1(2783,3330) ; R18.2@2825.06,2710 2825.06,2752.19 v1(2860,2787.13) ; v1(2826.38,3174.43) C38.2@2826.38,3126.93 2870.07,3126.93 2874,3123 ; v1(3045.06,2573) R17.1@3045.06,2620 3054,2620 v1(3054,2573) ; C39.2@3056.38,3126.93 3179.93,3126.93 3259.5,3206.5 ; C40.2@3286.38,3126.93 3259.5,3126.93 ; C45.1@3320.06,3380 3320.06,3267.06 ; v1(3395,3768) 3457.59,3830.59 R6.2@3526.07,3830.59 ; C41.2@3516.38,3126.93 3516.38,3144.62 3379.22,3281.78 3334.78,3281.78 ; C44.1@3555.06,3400 3521.5,3400 3408,3286.5 3339.5,3286.5 3334.78,3281.78 ; 3259.5,3126.93 3259.07,3126.93 3259.07,3190.07 3259.5,3190.5 ; 3259.5,3126.93 3259.5,3190.5 ; 3259.5,3190.5 v1(3282,3213) 3320.06,3251.06 3320.06,3267.06 ; 3259.5,3190.5 3259.5,3206.5 ; 3259.5,3206.5 3274,3221 v1(3282,3229) 3320.06,3267.06 ; 3320.06,3267.06 3334.78,3281.78
VCC3.3M: C13.2 C14.2 C15.2 C16.2 C17.2 C18.2 C19.2 C20.2 C21.2 C22.2 C23.2 C24.2 C25.2 C26.2 C27.2 D1.1 R3.2 R5.2 R8.2 R9.2 U1.15 U1.23 U1.36 U1.49 U1.62 U1.72 U1.82 U1.91 U1.103 U1.114 U1.127 U1.136 U1.149 U1.159 U1.172 | length 12670.8
  Top Layer w10: C26.2@2975.06,3485 2975.06,3827.06 3008,3860 C25.2@3075,3860 v1(3075,3908) ; v1(3344,3532.43) 3356.5,3532.43 3372.5,3548.43 U1.15@3450,3548.43 ; v1(3402,3387) 3405.95,3390.95 U1.23@3450,3390.95 ; U1.36@3450,3135.04 3526.48,3135.04 3578.02,3083.5 3611.5,3083.5 3623,3072 3623,3024 3610.06,3011.06 U1.49@3610.06,2896.24 ; v1(3578.06,4219.92) 3610.06,4187.92 v1@3610.06,4142.94 ; v1(3610,4143) v1@3610.06,4142.94 ; U1.172@3610.06,3905.33 v1@3610.06,4142.94 ; U1.149@4062.82,3905.33 4062.82,3842 4065.15,3839.66 4065.15,3827.5 4077.32,3827.5 4142.23,3762.59 4253.33,3762.59 4255.41,3760.5 4289,3760.5 ; U1.136@4318.72,3905.33 4318.72,3860.11 4285.61,3860.11 4273.5,3848 4273.5,3776 4289,3760.5 ; R5.2@4450.06,4210 v1(4450.06,4270) ; U1.91@4459.09,3016.93 4496.07,3016.93 4521,2992 4521,2928 4530.5,2918.5 4608.5,2918.5 4634,2944 4634,3134 4708,3208 4928,3208 4967,3247 4967,3360 5012,3405 v1(5192,3405) ; U1.127@4459.09,3725.59 4367.57,3725.59 4346.27,3746.89 ; v1(5133,3742) 5133,3464 v1(5192,3405) ; R3.2@5135.06,4210 v1(5181,4210) ; D1.1@5207.6,3088.74 5207.6,3389.4 v1(5192,3405) ; 4289,3760.5 4302.61,3746.89 4346.27,3746.89 ; 4289,3760.5 4332.66,3760.5 4346.27,3746.89
  Layer 2 w10: 3320,3615 3320,3933 3578.06,4191.06 ; v1(3344,3532.43) 3344,3921.86 ; v1(3402,3387) 3387,3372 3346,3372 3340,3378 3340,3950 3344,3950 3344,3954 ; v1(3578.06,4219.92) 3578.06,4191.06 ; v1@3587,4200 3578.06,4191.06 ; v1(3593.5,4190.5) 3578.06,4175.06 ; v1(3630,4240) 3587,4197 3578.06,4188.06 ; v1(5133,3742) 5133,4162 v1(5181,4210) ; 3344,3921.86 3344,3941 3350.5,3947.5 ; 3344,3921.86 3360.07,3937.93 ; 3344,3954 3578.06,4188.06 ; 3344,3954 3350.5,3947.5 ; 3350.5,3947.5 3578.06,4175.06 ; 3350.5,3947.5 3360.07,3937.93 ; 3360.07,3937.93 3578.06,4155.92 3578.06,4175.06 ; 3578.06,4175.06 3578.06,4188.06 ; 3578.06,4188.06 3578.06,4191.06
  Layer 3 w10: v1(3610,4143) 3642,4175 3864,4175 3899,4140 v1(3899,4010)
  Bottom Layer w10: v1(3075,3908) 2997.59,3830.59 R8.2@2991.07,3830.59 2991.07,3830 2821.07,3830 R9.2@2821.07,3830.59 2784,3830.59 2764,3850.59 2764,4158 2682,4240 ; C15.2@3240.06,4240 3131,4240 3122.94,4248.06 3020.06,4248.06 C14.2@3020.06,4240 C13.2@2800.06,4240 2682,4240 ; v1(3593.5,4190.5) 3544,4240 C16.2@3460.06,4240 3458,4240 3327.5,4370.5 3061.5,4370.5 3046,4355 2940,4355 2897,4312 2706,4312 2674,4280 2674,4248 2682,4240 ; v1(3630,4240) C17.2@3680.06,4240 C18.2@3900.06,4240 C19.2@4120.06,4240 4181.5,4240 4301,4359.5 4312,4359.5 ; C20.2@4340.06,4240 4309,4240 4301,4248 4301,4348.5 4312,4359.5 ; v1(5181,4210) 5151,4240 ; v1(5192,3405) 5324.94,3272.06 C27.2@5324.94,3160 ; C24.2@5245.06,4240 5151,4240 ; 4312,4359.5 4360.56,4359.5 v1(4450.06,4270) ; v1(4450.06,4270) 4480.06,4240 ; v1(4450.06,4270) 4450.06,4258 4468.06,4240 4480.06,4240 ; 4480.06,4240 C21.2@4570.06,4240 C22.2@4780.06,4240 C23.2@5010.06,4240 5151,4240
VCC5: 5V.1 C33.1 F1.1 J1.58 J1.59 J1.60 J3.2 USB.1 | length 7379
  Top Layer w10: 5V.1@2685,3930 2635,3880 2635,2253 2826,2062 2826,1920 ; USB.1@2809,1871.18 USB.1@2826,1871.18 ; F1.1@3016.46,1830 3016.46,1898.54 ; v1(3035,2129) 3016.46,2110.46 ; v1(3215,2194) C33.1@3215,2245 ; J3.2@4214.96,1925 4214.96,1963.96 4219,1968 4219,1998 4217,2000 v1(4217,2278) ; USB.1@2826,1871.18 2826,1920 ; USB.1@2826,1871.18 2893.82,1939 2976,1939 3016.46,1898.54 ; 2826,1920 3016.46,2110.46 ; 3016.46,1898.54 3016.46,2110.46
  Layer 1 w10: v1(4160,2312) 4126,2278 ; v1(4217,2278) 4126,2278 ; 3988.5,2140.5 4126,2278 ; 3988.5,2140.5 3977,2129 v1(3035,2129) 3084,2178 3215,2178 v1(3215,2194) 3268.5,2140.5 3988.5,2140.5
  Layer 2 w10: 4126,2278 v1(4217,2278) 4456,2278 4480,2302 ; 4536,2520 4536,2799
  Layer 3 w10: v1(4160,2312) 4251.96,2312 4482.16,2542.2 4857.7,2542.2 4873.5,2558 4873.5,2585.5 4859,2600 v1(4831,2600)
  Bottom Layer w10: v1(4831,2600) 4844.11,2613.11 J1.59@4910,2613.11 ; J1.60@4910,2581.61 J1.59@4910,2613.11 ; J1.58@4910,2644.61 J1.59@4910,2613.11
VCC_LED: C34.1 MOS1.3 R10.1 R15.2 | length 3147.3
  Top Layer w10: v1(2845,2141) R10.1@2845,2230 ; v1(4815,1828.79) 4825,1838.79 v1(4825,1858) MOS1.3@4825,2069.21
  Layer 1 w10: v1(2845,2141) 3127,1859 3501,1859 3502,1858 v1(4825,1858)
  Bottom Layer w10: R15.2@4135.06,3830 4135.06,3860.5 4169.57,3895 4335,3895 4385,3945 4534,3945 4559,3920 4559,3892 4539,3872 4539,3789 4562.06,3789 4575.06,3776 C34.1@4575.06,3740
VDDA: C6.2 C7.2 R2.2 R3.1 U1.39 | length 3902.7
  Top Layer w10: R2.2@3210,3465 3248,3465 ; v1(3251,3432) 3251,3462 ; U1.39@3450,3075.98 3392,3075.98 3374,3093.98 3374,3104 3310.54,3167.46 3310.54,3202.46 3305.5,3207.5 3305.5,3407.5 3251,3462 ; C6.2@4790.06,4210 v1(4849,4210) C7.2@4960.06,4210 v1(5060,4210) ; v1(5060,4120) R3.1@5135.06,4120 ; 3248,3465 3251,3462 ; 3248,3465 3251,3465 3251,3462
  Layer 1 w10: v1(3251,3432) 3019.5,3663.5 3019.5,4161.5 3324,4466 4299,4466 4483,4282 4777,4282 v1(4849,4210) ; v1(5060,4120) v1(5060,4210)
VREF+: J1.2 R13.1 | length 1450.7
  Layer 2 w10: v1(4783,2632) 4807,2656 ; 4923.5,2867.5 5003.5,2867.5 5224,3088 5224,3334 5168,3390 v1(5168,3605)
  Layer 3 w10: v1(4933,3670) 5103,3670 v1(5168,3605)
  Bottom Layer w10: J1.2@4724.96,2613.11 4764.11,2613.11 v1(4783,2632) ; R13.1@4805.06,3740 4863,3740 v1(4933,3670)
pads on no net: U3.40 U4.1 U4.2 U4.3 U4.4 U4.5 U4.6 U4.10 U4.11 U4.14 U4.15 U4.20 U4.21 U4.22 U4.23 U4.24 U4.25 U4.26 U4.27 U4.28 U4.33 U4.34 U4.35 U4.38 U4.39 U4.40 U4.45 U4.46 U4.47 U4.48 U6.9 USB.4

## Text inside footprints (layer, text, board x,y; h text height)
J3: Top Overlay "1" at 4238.65,1984 h30 r180; Top Overlay "40" at 3490.65,1988 h30 r180